# EAGLE board board2 (EAGLE 6.5.0)
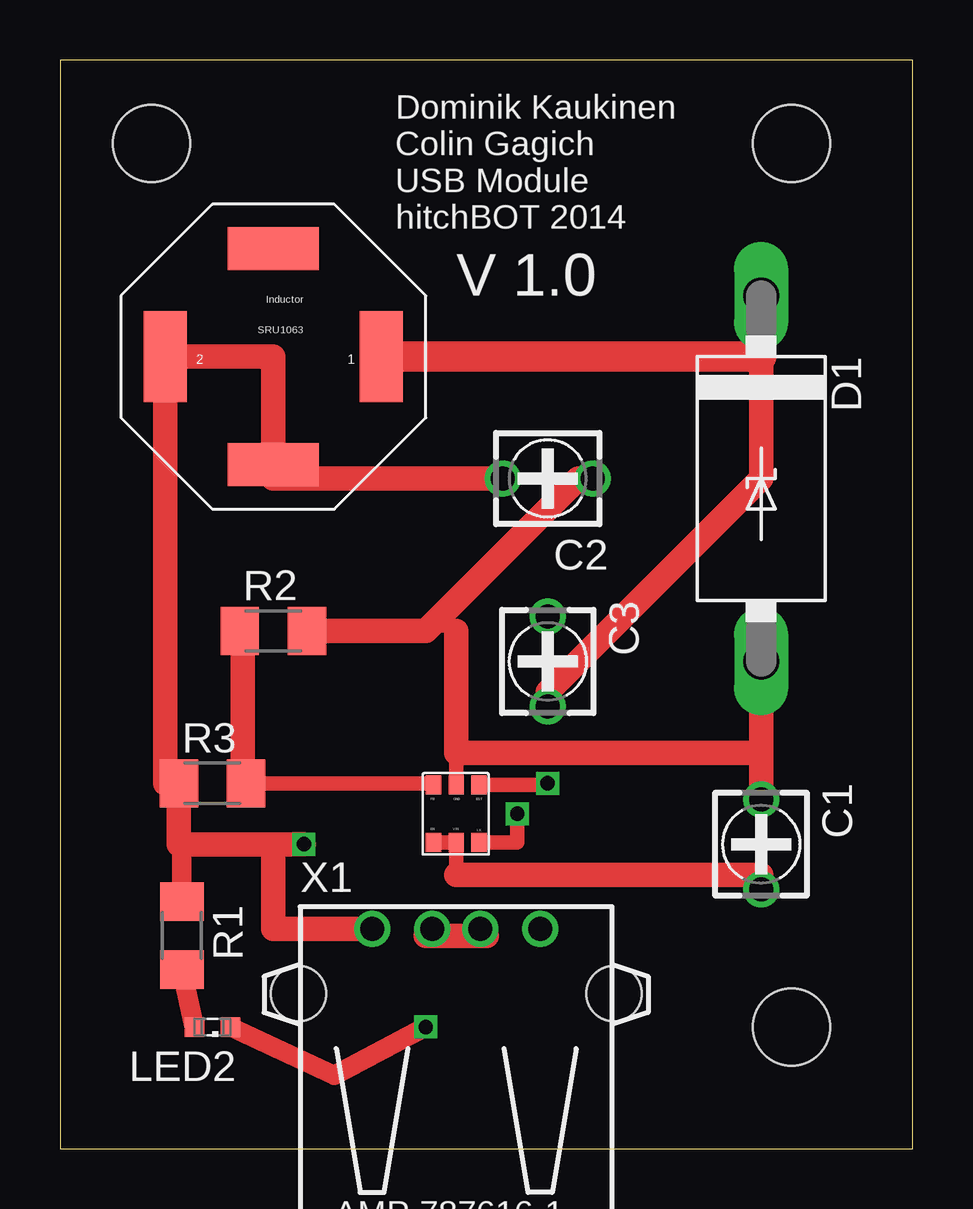
[diagram p0: board, top side]
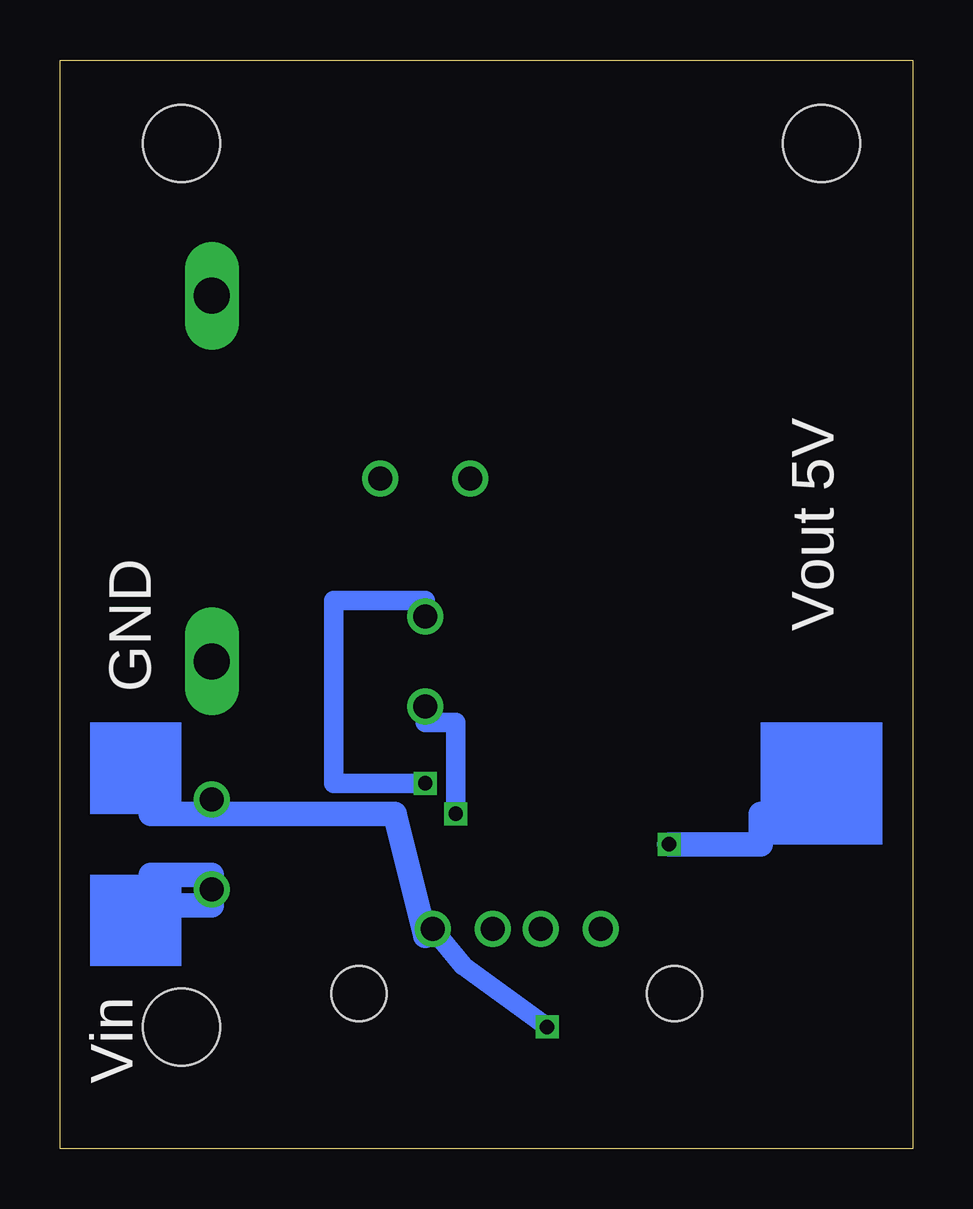
[diagram p1: board, bottom side, seen from below]

Size 35.54 x 45.39 mm. Coordinates in mm from the lower left corner, seen from the top.
Outline: 0,0 35.54,0 35.54,45.39 0,45.39 0,0
Copper layers (1*16): Top 0.0356mm / dielectric 1.5011mm / Bottom 0.0356mm
Design rules "LaenPCBOrder": minimum track width 6mil, minimum drill 13mil, track to track 6mil, track to pad 6mil, pad to pad 6mil, via to via 6mil, smd to smd 6mil, copper to edge 15mil, drill to drill 6mil, minimum pad ring 7mil, minimum via ring 7mil, stop-mask expansion 3mil, vias tented up to drill 0mil, thermal gap 10mil
Holes 3.2 mm at 3.81,41.91 30.48,41.91 30.48,5.08

## Footprints (pad centres in the part's own frame; a part is rotated, then mirrored left to right if it is on the bottom)
3008 = drill 1: + -1.875,0; - 1.875,0
C4111-15 = drill 1.499 long: A 7.62,0; C -7.62,0
SML0603 = smd 0.8 x 0.8: A 0.75,0; C -0.75,0
R1206 = smd 1.6 x 1.803: 1 -1.422,0; 2 1.422,0
M1206 = smd 1.6 x 2: 1 -1.4,0; 2 1.4,0
AO21282CI = smd 0.63 x 0.8: BST -0.95,-1.2; FB 0.95,-1.2; LX -0.95,1.2 | smd 0.635 x 0.8: EN 0.95,1.2; GND 0,-1.2; VIN 0,1.2
SRU1063 = smd 1.8 x 3.8: 1 -4.5,0; 2 4.5,0 | smd 3.8 x 1.8: P$3 0,4.5; P$4 0,-4.5
USB = drill 1: 1 -3.5,12.99; 2 -1,12.99; 3 1,12.99; 4 3.5,12.99 | hole 2.3: -6.57,10.28; 6.57,10.28

## Placement (x,y rotation side)
C1  4.7uF  [3008]  29.21,12.7 270 top
C2  10uF  [3008]  20.32,27.94 180 top
C3  0.1uF  [3008]  20.32,20.32 270 top
D1  1N5908  [C4111-15]  29.21,27.94 270 top
LED2  [SML0603]  6.35,5.08 180 top
R1  1k  [R1206]  5.08,8.89 270 top
R2  9.53k  [M1206]  8.89,21.59 0 top
R3  49.9k  [M1206]  6.35,15.24 0 top
U$1  AO21282CI  [AO21282CI]  16.51,13.97 180 top
U$2  SRU1063  [SRU1063]  8.89,33.02 180 top
X1  [USB]  16.51,-3.81 0 top

## Library data of the parts
C1-C3 = c-trimm; OC_FARNELL: unknown; OC_NEWARK: unknown
D1 = diode
LED2 = led
R1-R3 = rcl
U$1 U$2 = AO21282CI
X1 = con-amp

## Nets
DGND: C1.+ C2.+ D1.A LED2.C R2.2 U$1.GND X1.4
N$1: C1.- U$1.EN U$1.VIN
N$2: C3.+ U$1.BST
N$3: C3.- D1.C U$1.LX U$2.1
N$4: C2.- R1.1 R3.1 U$2.2 X1.1
N$5: R2.1 R3.2 U$1.FB
N$6: LED2.A R1.2
N$8: X1.2 X1.3

## Tracks (layer width: path | path; a pad name or v marks a point on that pad's centre or on a via)
DGND  (via drill 0.6)
  Top 0.152: 15.24,21.59 16.51,21.59 | 10.16,21.59 R2.2
  Top 0.61: 16.51,16.51 U$1.GND
  Top 0.813: LED2.C 11.43,3.06 v15.24,5.08
  Top 1.016: 16.51,21.59 16.51,16.51 29.21,16.51 | R2.2 15.24,21.59 21.59,27.94 C2.+ | C1.+ 29.21,16.51 | 29.21,16.51 D1.A
  Bottom 0.152: 20.32,8.89 X1.4 | 29.21,13.97 C1.+
  Bottom 0.813: v15.24,5.08 18.74,7.62 X1.4
  Bottom 1.016: 20.32,8.89 21.59,13.97 29.21,13.97 31.75,13.97 31.75,15.24
N$1
  Top 0.61: 16.51,11.43 U$1.VIN U$1.EN
  Top 1.016: 16.51,11.43 29.21,11.43 C1.-
N$2  (via drill 0.6)
  Top 0.61: U$1.BST 20.32,15.17 v20.32,15.24
  Bottom 0.813: v20.32,15.24 24.13,15.24 24.13,22.86 20.32,22.86 C3.+
N$3  (via drill 0.6)
  Top 0.152: 29.21,33.02 D1.C
  Top 0.61: U$1.LX 19.05,12.77 v19.05,13.97
  Top 1.016: 29.21,33.02 29.21,27.94 20.32,19.05 C3.-
  Top 1.27: 29.21,33.02 U$2.1
  Bottom 0.61: 20.32,17.78 C3.-
  Bottom 0.813: v19.05,13.97 19.05,17.78 20.32,17.78
N$4  (via drill 0.6)
  Top 0.152: 5.08,10.16 R1.1
  Top 0.813: 5.08,12.7 5.08,10.16
  Top 1.016: C2.- 8.89,27.94 8.89,33.02 U$2.2 4.39,15.24 R3.1 4.95,12.7 5.08,12.7 8.89,12.7 | X1.1 8.89,9.18 8.89,12.7 | 8.89,12.7 v10.16,12.7
  Bottom 1.016: v10.16,12.7 6.35,12.7 6.35,13.97
N$5
  Top 0.152: 7.62,15.24 R3.2 | 7.62,21.59 R2.1
  Top 0.406: 15.56,15.24 U$1.FB
  Top 0.61: R3.2 15.56,15.24
  Top 1.016: 7.62,21.59 7.62,15.24
N$6
  Top 0.813: LED2.A R1.2
N$7
  Bottom 1.016: 29.21,11.43 31.75,11.43 31.75,10.16 29.21,10.16
N$8
  Top 0.254: X1.2 16.51,8.89 X1.3
N$9
  Top 1.016: 15.24,8.89 17.78,8.89
(copper drawn outside any net)
  shapes: Bottom area x3

## Text on the board
bPlace: Vout 5V | GND | Vin
tNames: Dominik Kaukinen / Colin Gagich / USB Module / hitchBOT 2014 | V 1.0